# Altium PCB date_monocolour.PcbDoc
Units mm, origin at the board's own origin, x right, y up, seen from the top; angles counter-clockwise.
Board outline 90.11 x 29 mm, 2 copper layers (Top Layer, Bottom Layer); 6 components, 21 nets, 91 pads, 27 vias.
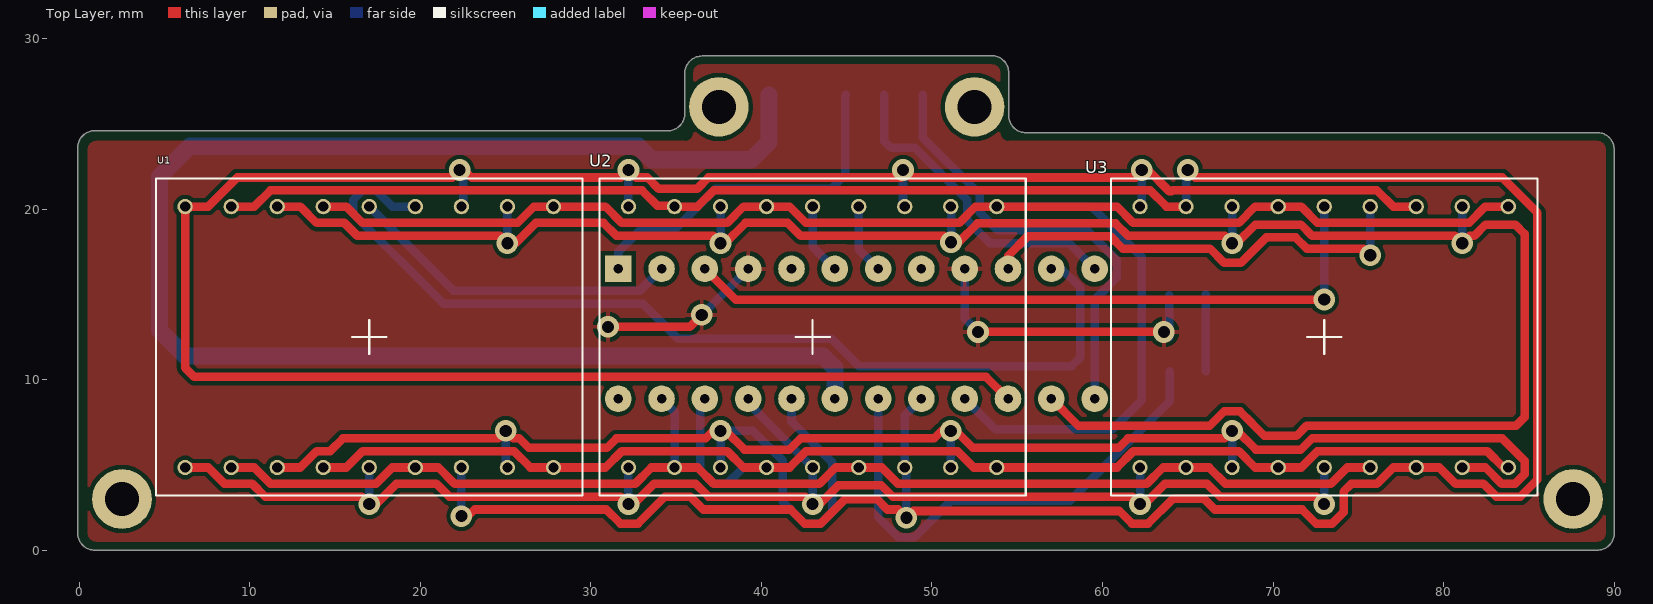
[diagram p0: Top Layer view]
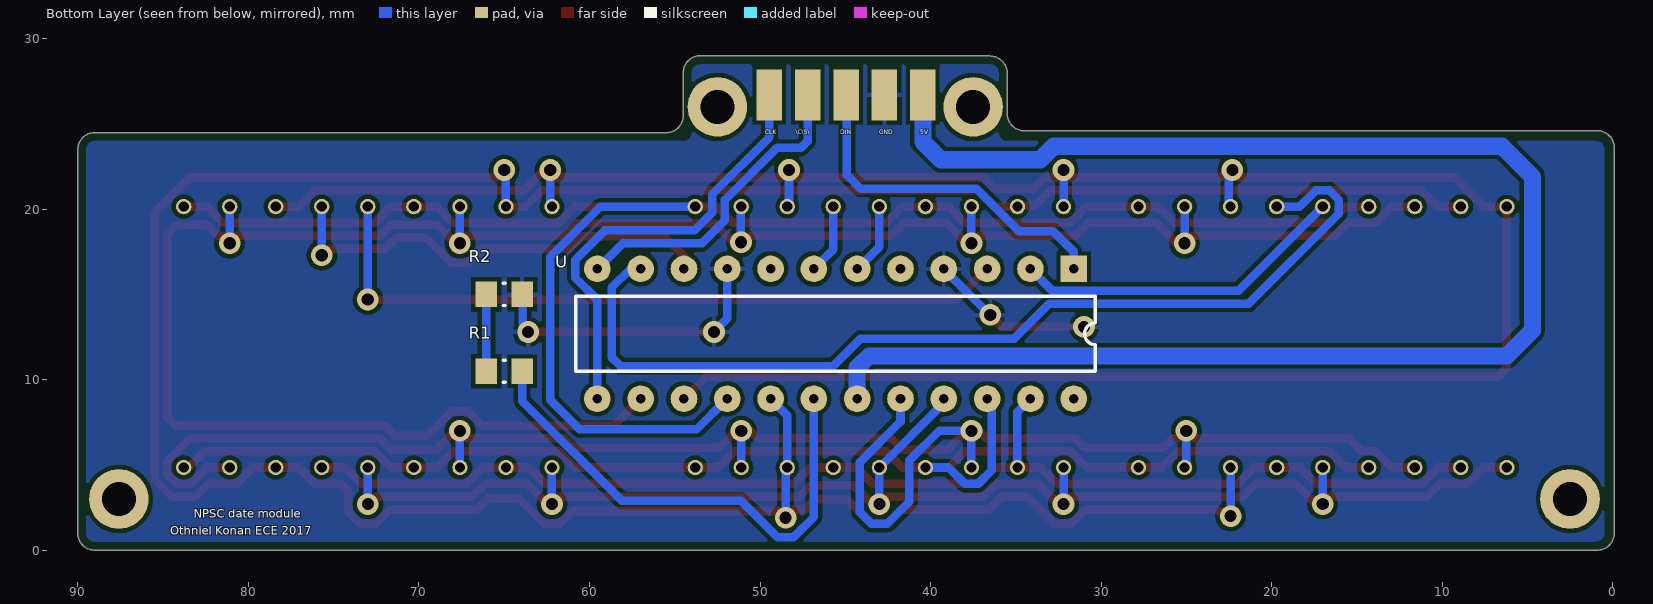
[diagram p1: Bottom Layer view, seen from below]

## Layer stack, top to bottom
Top Solder: solder mask 0.0102, Solder Resist, Dk 3.5
Top Layer: signal copper 0.0356
Dielectric 1: dielectric 0.32, FR-4, Dk 4.8
Bottom Layer: signal copper 0.0356
Bottom Solder: solder mask 0.0102, Solder Resist, Dk 3.5

## Board outline
-0.1,1 ccw(c0.9,1) 0.9,0 89.013,0 ccw(c89.013,1) 90.013,1 90.013,23.5 90.007,23.5 ccw(c89.007,23.493) 89,24.493 89,24.487 55.5,24.487 cw(c55.5,25.487) 54.5,25.487 54.5,28 ccw(c53.5,28) 53.5,29 36.525,29 36.525,28.983 ccw(c36.525,27.959) 35.5,27.959 35.5,25.6 cw(c34.5,25.6) 34.5,24.6 0.9,24.6 ccw(c0.9,23.6) -0.1,23.6

## Design rules (kind name [scope] priority, off if disabled: settings)
Clearance [All] p1: gap=0.254
HoleSize [All] p1: absolutevalues=TRUE maxlimit=1 minlimit=0.025 maxpercent=80.000 minpercent=20.000
PolygonConnect [All] p1: connectstyle=Relief reliefconductorwidth=0.254 reliefentries=4 polygonreliefangle="90 Angle" airgapwidth=0.254
RoomDefinition date_monocolour [InComponentClass('date_monocolour')] p1: confinementstyle=ConfineIn formatcopy=TRUE lockcomponents=FALSE outline -6.75,-13.3 86.35,-13.3 86.35,39.1 -6.75,39.1
RoutingVias [All] p1: holewidth=0.711 width=1.27 viastyle="Through Hole" minholewidth=0.711 minwidth=1.27 maxholewidth=0.711 maxwidth=1.27
SolderMaskExpansion [All] p1: expansion=0.102
Width [All] p1: maxlimit=1 minlimit=0.254 preferedwidth=0.254
29 further rules are at their usual default settings.

## Components (designator, comment, footprint, x,y, rotation, side; value= is the part's Value field where it differs from the comment)
R1 "1K 1% 0805(2012)" RESC0805(2012)_M 65,10.5 r0 bottom
R2 "8K2 1% 0805(2012)" RESC0805(2012)_M 65,15 r0 bottom
U "MAX7219" DIP24 31.6,16.5 r270 bottom
U1 "2dig_7digits_common_cathode" HDSP-52 17,12.5 r0 top
U2 "2dig_7digits_common_cathode" HDSP-52 43,12.5 r0 top
U3 "2dig_7digits_common_cathode" HDSP-52 73,12.5 r0 top

## Footprints (in the part's own frame and the unit in brackets; to place one, negate y for a bottom-side part, rotate by r counter-clockwise, add the part's x,y. Pads: shape width x height; smd on the part's side, far side on the other; paste and mask are expansions set on the pad)
DIP24 [mm]
  rect 1.56x1.56 hole 0.56: 1(0,0)
  round 1.56 hole 0.56: 2(0,-2.54) 3(0,-5.08) 4(0,-7.62) 5(0,-10.16) 6(0,-12.7) 7(0,-15.24) 8(0,-17.78) 9(0,-20.32) 10(0,-22.86) 11(0,-25.4) 12(0,-27.94) 13(7.62,-27.94) 14(7.62,-25.4) 15(7.62,-22.86) 16(7.62,-20.32) 17(7.62,-17.78) 18(7.62,-15.24) 19(7.62,-12.7) 20(7.62,-10.16) 21(7.62,-7.62) 22(7.62,-5.08) 23(7.62,-2.54) 24(7.62,0)
  silkscreen extent 1.61,-29.21 6.01,1.27
HDSP-52 [mm]
  round 0.9 hole 0.6: 1(-10.8,-7.65) 2(-8.1,-7.65) 3(-5.4,-7.65) 4(-2.7,-7.65) 5(0,-7.65) 6(2.7,-7.65) 7(5.4,-7.65) 8(8.1,-7.65) 9(10.8,-7.65) 10(10.8,7.65) 11(8.1,7.65) 12(5.4,7.65) 13(2.7,7.65) 14(0,7.65) 15(-2.7,7.65) 16(-5.4,7.65) 17(-8.1,7.65) 18(-10.8,7.65)
  silkscreen extent -12.5,-9.3 12.5,9.3, body extent -12.5,-9.3 12.5,9.3, height 6.8
RESC0805(2012)_M [mm] "Chip Resistor, Body 2.0x1.3mm, IPC Low Density"
  rect 1.25x1.5 smd: 1(-1.05,0) 2(1.05,0)
  silkscreen extent -0.05,-0.65 0.05,0.65, body extent -1.1,-0.67 1.1,0.67, height 0.7

## Part data
R1 R2: library part CMP-1013-00954-1, "8M45 0.125W 1% 0805 (2012 Metric)  SMD"
U: "Serial Interface, 8-Digit LED Display Drivers"
U1 U2 U3: library part HDSP-52, "2 digits 7 bits display Green 14.2mm"

## Free pads (board coordinates)
  round 3.5 hole 2: 1(2.5,3) 2(87.6,3) 3(52.5,26) 4(37.5,26)
  rect 1.5x3 smd far side: 1(40.454,26.704) 2(42.704,26.704) 3(44.954,26.704) 4(47.204,26.704) 5(49.454,26.704)

## Via types
v1: diameter 1.27, hole 0.711, Top Layer to Bottom Layer, tented both sides, 23 vias
v2: diameter 1.27, hole 0.711, Top Layer to Bottom Layer, 4 vias

## Nets (pads, with @x,y where several pads share a name; then routed paths per layer and width w, separated by ;. In a path a pad name is that pad's centre, name@x,y a point inside that pad or via, vN(x,y) a via of type N, cw(c..) or ccw(c..) an arc to the next point about the centre after c; other vN are vias at no path point)
5V: pad.1@40.454,26.704 U.19 | length 91.3
  Bottom Layer w1: pad.1@40.454,26.704 40.454,23.954 39.4,22.9 33.564,22.9 32.775,23.689 6.489,23.689 4.7,21.9 4.7,12.9 6.204,11.396 43.604,11.396 44.3,10.7 U.19
\C\S\: pad.4@47.204,26.704 U.12 | length 18.9
  Bottom Layer w0.5: pad.4@47.204,26.704 47.204,23.996 47.6,23.6 48.999,23.6 52.054,20.545 52.054,19.346 53.4,18 58.04,18 U.12
A: U1.11 U1.16 U2.11 U2.16 U3.11 U3.16 U.14 | length 129.1
  Top Layer w0.5: U1.16 12.951,20.15 13.905,19.196 14.695,19.196 14.699,19.2 15.535,19.2 16.293,18.442 24.658,18.442 v1(25.1,18) 25.566,18 26.762,19.196 30.739,19.196 31.493,18.442 37.158,18.442 v1(37.6,18) 37.865,18 39.061,19.196 41.539,19.196 42.293,18.442 43.707,18.442 43.711,18.446 44.989,18.446 44.993,18.442 50.732,18.442 v1(51.117,18.057) 51.557,18.057 52.667,19.167 60.768,19.167 61.493,18.442 67.158,18.442 v1(67.6,18) 67.866,18 68.966,19.1 71.635,19.1 72.293,18.442 80.658,18.442 v1(81.1,18) ; U.14 58.568,7.312 66.301,7.312 67.128,8.139 68.072,8.139 68.739,7.472 68.739,7.461 69.5,6.7 71.368,6.7 71.98,7.312 84.266,7.312 84.754,7.8 84.754,18.546 84.2,19.1 82.466,19.1 81.808,18.442 v1@81.542,18.442
  Bottom Layer w0.5: v1(25.1,18) U1.11 ; v1(37.6,18) U2.16 ; v1(51.117,18.057) U2.11@51.117,20.133 ; v1(67.6,18) U3.16 ; v1(81.1,18) U3.11
B: U1.10 U1.15 U2.10 U2.15 U3.10 U3.15 U.16 | length 103.4
  Top Layer w0.5: U1.15 15.651,20.15 16.605,19.196 25.696,19.196 26.65,20.15 U1.10 30.851,20.15 31.805,19.196 37.995,19.196 38.949,20.15 U2.15 41.651,20.15 42.605,19.196 43.395,19.196 43.399,19.2 45.301,19.2 45.305,19.196 51.596,19.196 52.55,20.15 U2.10 60.851,20.15 61.805,19.196 67.996,19.196 68.95,20.15 U3.15 71.651,20.15 72.605,19.196 81.496,19.196 82.45,20.15 U3.10
  Bottom Layer w0.5: U.16 53.7,7.1 60.6,7.1 62.3,8.8 62.3,17.2 59.35,20.15 U2.10
C: U1.3 U1.8 U2.3 U2.8 U3.3 U3.8 U.20 | length 109.5
  Top Layer w0.5: U1.3 12.951,4.85 13.905,5.804 14.695,5.804 14.699,5.8 15.457,6.558 24.558,6.558 v1(25,7) 25.442,6.558 25.807,6.558 26.365,6 30.935,6 31.493,6.558 36.718,6.558 37.16,7 v1(37.6,7) 37.9,7 39,5.9 41.635,5.9 42.293,6.558 50.12,6.558 50.562,7 v1(51.1,7) 51.4,7 52.4,6 60.935,6 61.493,6.558 67.158,6.558 v1(67.6,7) 67.9,7 69,5.9 71.635,5.9 72.293,6.558 83.441,6.558 84.754,5.245 84.754,4.455 84.195,3.896 83.405,3.896 82.451,4.85 U3.8
  Bottom Layer w0.5: U1.8@25,4.95 v1(25,7) ; U2.3@37.6,4.851 v1(37.6,7) 39.499,7 41.254,5.245 41.254,2.835 42.528,1.561 43.472,1.561 44.139,2.228 44.139,5.161 41.76,7.54 U.20 ; U2.8@51.001,4.949 U2.8@51.1,5.049 ; U2.8@51.1,5.049 v1(51.1,7) ; U3.3 v1(67.6,7)
CLK: pad.5 U.13 | length 26.1
  Bottom Layer w0.5: pad.5 49.454,24.212 52.808,20.857 52.808,19.793 53.847,18.754 59.102,18.754 60.824,17.032 60.824,15.968 59.54,14.684 U.13
D: U1.2 U1.6 U2.2 U2.6 U3.2 U3.6 U.23 | length 75.1
  Top Layer w0.5: U1.2 10.251,4.85 11.205,3.896 17.395,3.896 18.349,4.85 U1.6 21.051,4.85 22.005,3.896 32.595,3.896 33.549,4.85 U2.2 36.251,4.85 37.205,3.896 43.395,3.896 44.349,4.85 U2.6 47.051,4.85 48.005,3.896 62.595,3.896 63.549,4.85 U3.2 66.251,4.85 67.205,3.896 73.395,3.896 74.349,4.85 U3.6
  Bottom Layer w0.5: U.23 34.9,8.12 U2.2
DIG0: U1.14 U.2 | length 19.7
  Bottom Layer w0.5: U1.14 21.934,15.216 32.856,15.216 U.2
DIG1: U1.13 U.11 | length 57.3
  Bottom Layer w0.5: U1.13 18.349,20.15 17.395,21.104 16.605,21.104 16.046,20.545 16.046,19.755 21.339,14.462 33.038,14.462 35.1,12.4 44.1,12.4 45.7,10.8 58.186,10.8 58.7,11.314 58.7,15.4 U.11@57.6,16.5
DIG2: U2.14 U.6 | length 4.2
  Bottom Layer w0.5: U2.14 43,17.8 U.6
DIG3: U2.13 U.7 | length 4.1
  Bottom Layer w0.5: U2.13 45.7,17.64 U.7
DIG4: U3.14 U.3 | length 42.5
  Top Layer w0.5: U.3 38.48,14.7 v1(73,14.7)
  Bottom Layer w0.5: v1(73,14.7) U3.14
DIG5: U3.13 U.10 | length 27
  Top Layer w0.5: U.10 54.46,17.26 55.613,18.413 60.455,18.413 61.18,17.688 66.301,17.688 67.128,16.861 68.115,16.861 69.6,18.346 71.322,18.346 71.98,17.688 75.312,17.688 v1(75.7,17.3)
  Bottom Layer w0.5: v1(75.7,17.3) U3.13
DIN: pad.3@44.954,26.704 U.1 | length 20.9
  Bottom Layer w0.5: U.1 31.6,17.5 32.8,18.7 34.8,18.7 37.3,21.2 44.1,21.2 44.9,22 44.9,26.65 pad.3@44.954,26.704
DP: U1.4 U1.9 U2.4 U2.9 U3.4 U3.9 U.22 | length 82.1
  Top Layer w0.5: U1.4 15.651,4.85 16.605,5.804 25.495,5.804 26.449,4.85 U1.9 30.851,4.85 31.805,5.804 37.995,5.804 38.949,4.85 U2.4 41.651,4.85 42.605,5.804 51.495,5.804 52.449,4.85 U2.9 60.851,4.85 61.805,5.804 67.995,5.804 68.949,4.85 U3.4 71.651,4.85 72.605,5.804 82.563,5.804 U3.9@83.517,4.85
  Bottom Layer w0.5: U.22 36.401,8.601 36.401,4.7 37.205,3.896 37.995,3.896 38.949,4.85 U2.4
E: U1.1 U1.5 U2.1 U2.5 U3.1 U3.5 U.21 | length 88.1
  Top Layer w0.5: U1.1 7.551,4.85 8.505,3.896 9.295,3.896 9.299,3.9 10.135,3.9 10.893,3.142 16.558,3.142 v1(17,2.7) 17.4,2.7 18.596,3.896 20.939,3.896 21.693,3.142 31.758,3.142 v1(32.2,2.7) 32.5,2.7 33.7,3.9 34.501,3.9 34.505,3.896 35.295,3.896 35.299,3.9 36.135,3.9 36.893,3.142 42.558,3.142 v1(43,2.7) 43.4,2.7 44.5,3.8 47.035,3.8 47.693,3.142 61.758,3.142 v1(62.2,2.7) 62.465,2.7 63.661,3.896 65.295,3.896 65.299,3.9 66.135,3.9 66.893,3.142 72.558,3.142 v1(73,2.7)
  Bottom Layer w0.5: U1.1@6.1,4.95 U1.1 ; v1(17,2.7) 17,3.1 U1.5 ; v1(32.2,2.7) U2.1 ; U.21 39.22,8.63 U2.5 ; v1(43,2.7) U2.5 ; v1(62.2,2.7) U3.1 ; v1(73,2.7) U3.5
F: U1.12 U1.18 U2.12 U2.18 U3.12 U3.18 U.15 | length 142.8
  Top Layer w0.5: U.15 53.176,10.164 6.736,10.164 6.2,10.7 U1.18 7.551,20.15 9.259,21.858 21.858,21.858 v1(22.3,22.3) 22.558,22.3 23,21.858 31.758,21.858 v1(32.2,22.3) 32.642,21.858 33.308,21.858 33.966,21.2 36.235,21.2 36.893,21.858 48.2,21.858 48.3,21.958 v1(48.3,22.3) 48.742,21.858 61.958,21.858 62.3,22.2 v1(62.3,22.3) 62.666,22.3 63.917,21.05 64.062,21.05 64.117,21.104 76.095,21.104 77.049,20.15 U3.12
  Bottom Layer w0.5: v1(22.3,22.3) 22.5,22.1 U1.12@22.5,20.25 ; U2.18 v1(32.2,22.3) ; U2.12@48.3,20.25 v1(48.3,22.3) ; U3.18@62.3,20.25 v1(62.3,22.3)
G: U1.7 U1.17 U2.7 U2.17 U3.7 U3.17 U.17 | length 178.1
  Top Layer w0.5: U1.17 10.251,20.15 11.205,21.104 11.995,21.104 11.999,21.1 13.901,21.1 13.905,21.104 32.996,21.104 33.9,20.2 34.85,20.2 U2.17 36.251,20.15 37.205,21.104 54.195,21.104 54.199,21.1 61.801,21.1 61.805,21.104 62.796,21.104 63.75,20.15 U3.17 ; v1(22.4,2) 22.788,2 23.176,2.388 30.901,2.388 31.728,1.561 32.761,1.561 34.342,3.142 35.607,3.142 35.611,3.146 35.822,3.146 36.58,2.388 41.701,2.388 42.528,1.561 43.472,1.561 44.911,3 46.768,3 47.38,2.388 48.012,2.388 v1(48.5,1.9) 48.9,2.3 60.989,2.3 61.728,1.561 62.672,1.561 64.127,3.016 65.952,3.016 66.58,2.388 71.701,2.388 72.528,1.561 73.472,1.561 74.139,2.228 74.139,3.439 74.596,3.896 76.095,3.896 77.049,4.85 U3.7 79.751,4.85 80.705,3.896 82.339,3.896 83.093,3.142 84.507,3.142 85.508,4.143 85.508,19.791 83.441,21.858 65.442,21.858 v1(65,22.3)
  Bottom Layer w0.5: v1(22.4,2) U1.7 ; v1(48.5,1.9) 48.5,4.75 U2.7 48.4,7.9 U.17 ; U3.17 64.9,22.2 v1(65,22.3)
GND: pad.2@42.704,26.704 R2.1 U.4 U.9 | length 27.4
  Top Layer w0.5: v2(31,13.1) 35.8,13.1 v2(36.5,13.8) ; v2(52.7,12.8) v2(63.6,12.8)
  Bottom Layer w0.5: v2(36.5,13.8) 36.52,13.8 U.4 ; U.9 51.92,13.58 v2(52.7,12.8) ; v2(63.6,12.8) 63.9,12.5 R2.1@63.9,14.95
NetR1_1: R1.1 U.18 | length 29.6
  Bottom Layer w0.5: U.18 46.84,1.949 48.028,0.761 48.972,0.761 51.111,2.9 58.1,2.9 63.95,8.75 R1.1
NetR1_2: R1.2 R2.2 | length 4.5
  Bottom Layer w0.5: R1.2 R2.2
pads on no net: U.5 U.8 U.24

## Polygon pours and split planes (outlines as drawn)
GND on Top Layer "Top Layer-No Net" (solid, pour order 7): 0.5,1 ccw(c1,1) 1,0.5 89,0.5 ccw(c89,1) 89.5,1 89.5,23.5 ccw(c89,23.5) 89,24 54.5,24 cw(c54.5,24.5) 54,24.5 54,28 ccw(c53.5,28) 53.5,28.5 36.5,28.5 ccw(c36.5,28) 36,28 36,24.5 cw(c35.5,24.5) 35.5,24 1,24 ccw(c1,23.5) 0.5,23.5
GND on Bottom Layer "Top Layer-No Net1" (solid, pour order 9): 0.5,1 ccw(c1,1) 1,0.5 89,0.5 ccw(c89,1) 89.5,1 89.5,23.5 ccw(c89,23.5) 89,24 54.5,24 cw(c54.5,24.5) 54,24.5 54,28 ccw(c53.5,28) 53.5,28.5 36.5,28.5 ccw(c36.5,28) 36,28 36,24.5 cw(c35.5,24.5) 35.5,24 1,24 ccw(c1,23.5) 0.5,23.5

## Silkscreen, mask and mechanical layers (free items; w line width, h text height)
Bottom Overlay:
  text "5V" at 40.6,24.4 h0.25
  text "GND" at 43,24.4 h0.25
  text "DIN" at 45.3,24.4 h0.25
  text "\C\S\" at 47.9,24.4 h0.25
  text "CLK" at 49.7,24.4 h0.25
  text "NPSC date module" at 83.2,1.9 h0.5
  text "Othniel Konan ECE 2017" at 84.6,0.9 h0.5
Mechanical 1:
  lines w0.254: -0.113,23.6 -0.1,23.6 ; 36.525,28.983 ccw(c36.525,27.959) 35.5,27.959 35.5,25.6 cw(c34.5,25.6) 34.5,24.6 0.9,24.6 ; 36.525,29 53.5,29 cw(c53.5,28) 54.5,28 54.5,25.487 ccw(c55.5,25.487) 55.5,24.487 89,24.487 ; 89,24.493 cw(c89.007,23.493) 90.007,23.5 90.013,23.5 90.013,1 cw(c89.013,1) 89.013,0 0.9,0 cw(c0.9,1) -0.1,1 -0.1,23.6 ; -0.1,23.6 cw(c0.9,23.6) 0.9,24.6 ; 0.9,24.6 0.9,24.6 ; 54,24.5 ccw(c54.5,24.5) 54.5,24 ; 54,24.5 54,24.5 ; 54,24.5 54,28 ccw(c53.5,28) 53.5,28.5 36.5,28.5 ccw(c36.5,28) 36,28 36,24.5 cw(c35.5,24.5) 35.5,24 1,24 ccw(c1,23.5) 0.5,23.5 0.5,1 ccw(c1,1) 1,0.5 89,0.5 ccw(c89,1) 89.5,1 89.5,23.5 ccw(c89,23.5) 89,24 54.5,24 ; 54.5,24 54.5,24